# Altium PCB Pi3-GPS-Neo6M.PcbDoc
Units mm, origin at the board's own origin, x right, y up, seen from the top; angles counter-clockwise.
Board outline 87.26 x 57.77 mm, 2 copper layers (Top Layer, Bottom Layer); 10 components, 19 nets, 104 pads, 148 vias.
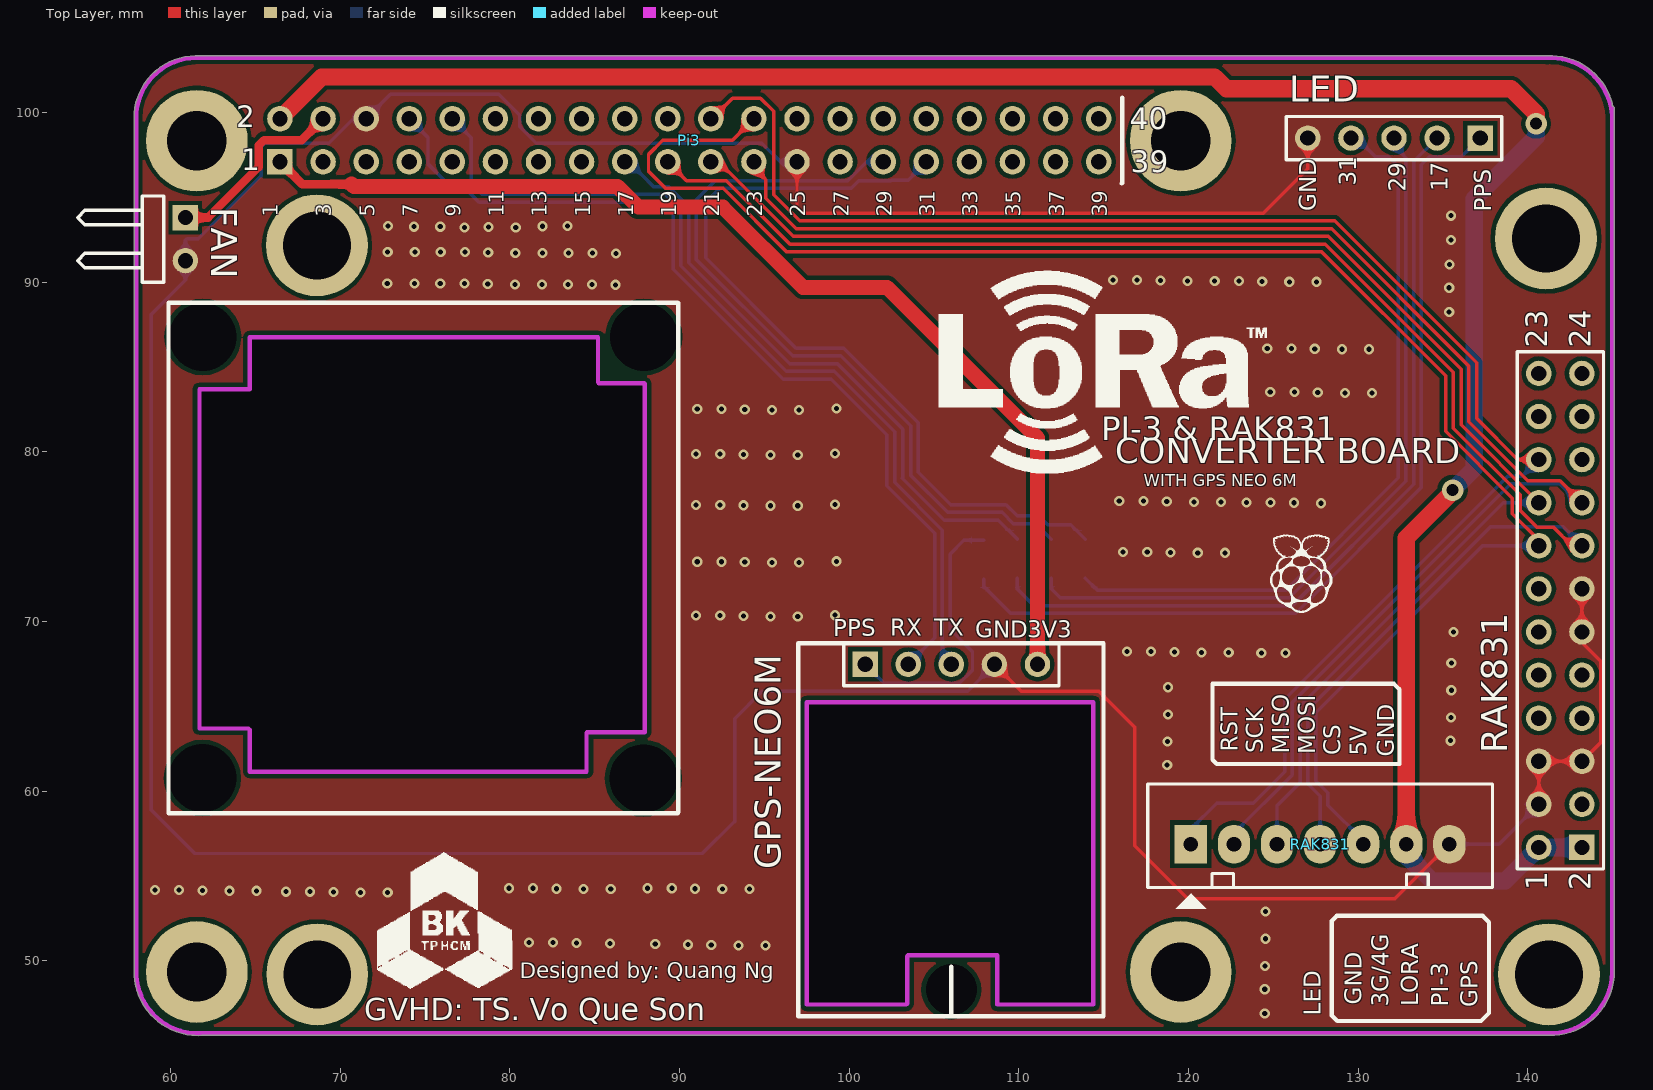
[diagram p0: Top Layer view]
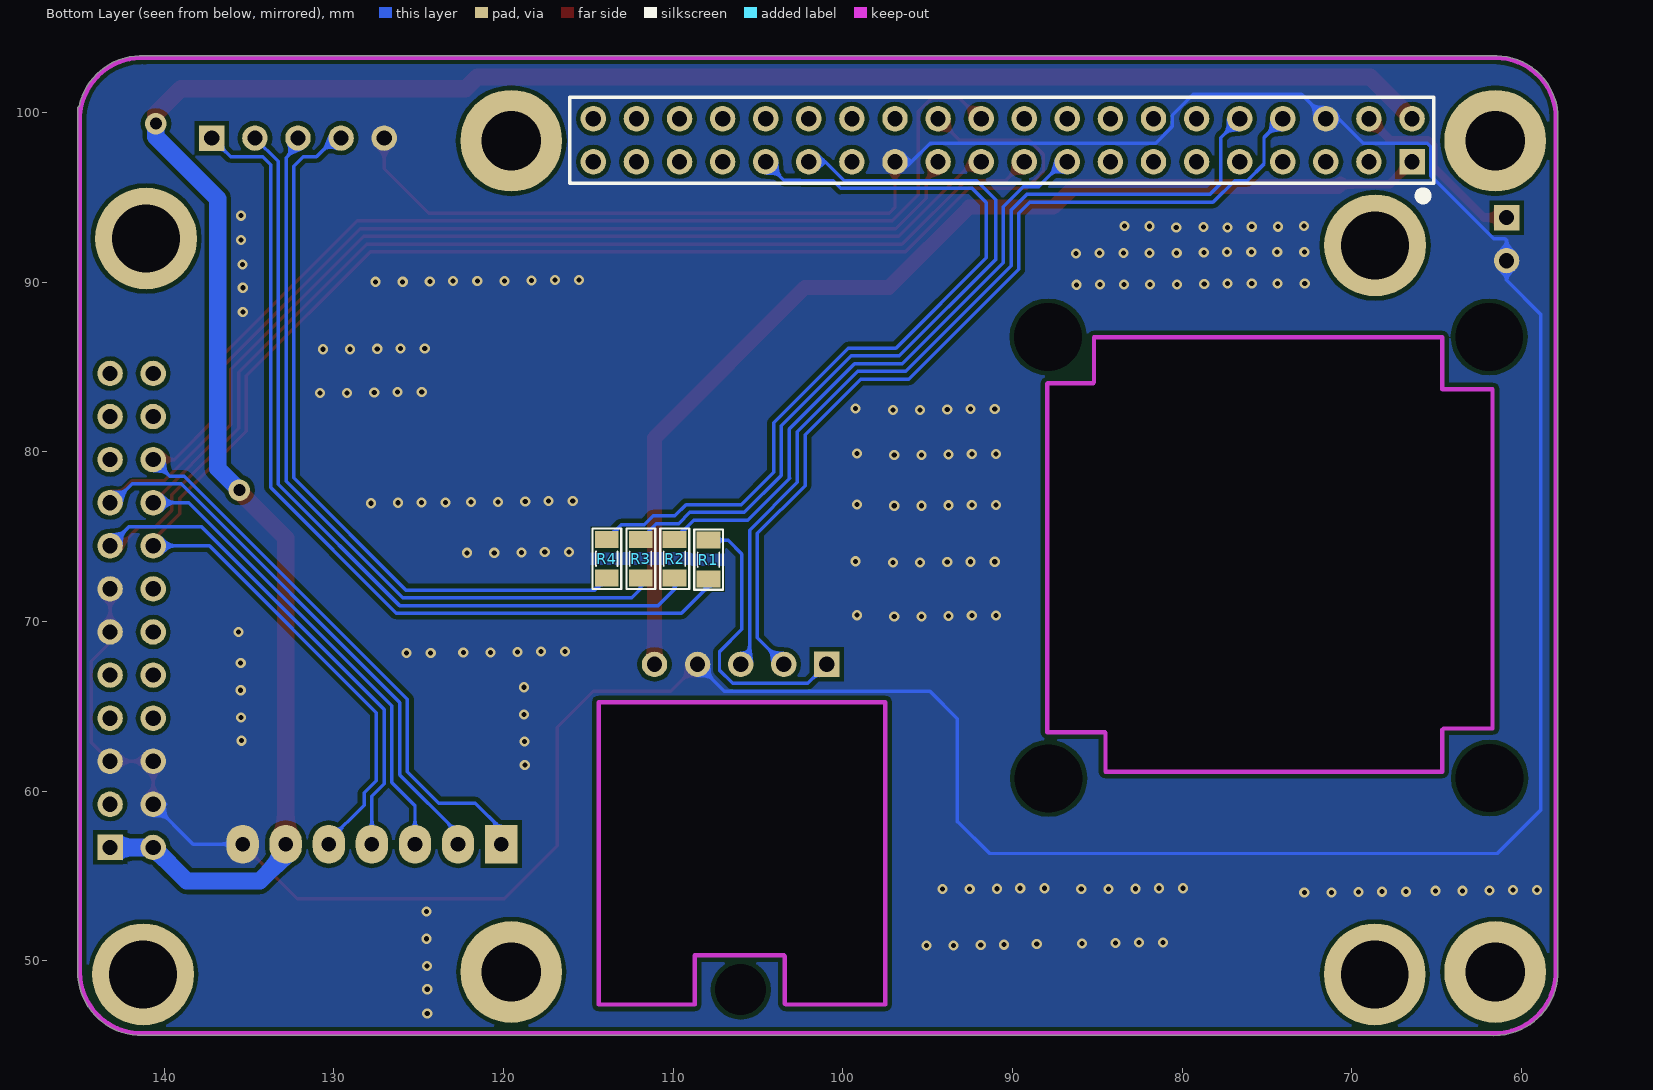
[diagram p1: Bottom Layer view, seen from below]

## Layer stack, top to bottom
Top Solder: solder mask 0.0102, Solder Resist, Dk 3.5
Top Layer: signal copper 0.0356
Dielectric 1: dielectric 0.32, FR-4, Dk 4.8
Bottom Layer: signal copper 0.0356
Bottom Solder: solder mask 0.0102, Solder Resist, Dk 3.5

## Board outline
61.278,45.607 ccw(c61.325,45.725) 61.325,45.598 61.396,45.598 ccw(c61.625,49.375) 61.854,45.598 141.55,45.598 ccw(c141.55,45.725) 141.558,45.598 ccw(c141.325,49.375) 145.109,49.375 ccw(c141.325,49.375) 145.102,49.604 145.102,100.25 ccw(c144.975,100.25) 145.026,100.367 ccw(c141.325,99.575) 141.123,103.354 61.477,103.354 ccw(c61.477,103.227) 61.475,103.354 ccw(c61.52,99.682) 57.848,99.638 ccw(c61.52,99.682) 57.848,99.637 57.848,99.639 57.848,49.15 ccw(c57.975,49.15) 57.848,49.142 ccw(c61.625,49.375)
cut-out: 64.675,86.75 85.2,86.75 85.2,84.1 85.3,84 87.95,84 87.95,63.475 84.525,63.475 84.525,61.15 64.675,61.15 64.675,63.625 64.6,63.7 61.702,63.7 61.702,83.7 64.675,83.7
cut-out: 97.5,65.25 114.4,65.25 114.4,47.425 108.725,47.425 108.725,50.325 103.475,50.325 103.475,47.425 97.5,47.425

## Design rules (kind name [scope] priority, off if disabled: settings)
Clearance [All] p1: gap=0.254 ignorepadtopadclearanceinfootprint=FALSE except(0: Arc-Hole Track-Hole SMDPad-Hole THPad-Hole Via-Hole Fill-Hole Poly-Hole Region-Hole Text-Hole)
PlaneConnect [All] p1: planeconnectstyle=Direct reliefexpansion=0.508 reliefentries=4 reliefconductorwidth=0.254 reliefairgap=0.254
PolygonConnect [All] p1: connectstyle=Direct reliefconductorwidth=0.254 reliefentries=4 polygonreliefangle="90 Angle" airgapwidth=0.254
RoutingVias [All] p1: holewidth=1.5 width=0.6 viastyle="Through Hole" minholewidth=0.3 minwidth=0.3 maxholewidth=0.3 maxwidth=1.5
SolderMaskExpansion [All] p1: expansion=0.102
Width [All] p1: maxlimit=1.016 minlimit=0.203 preferedwidth=0.203 minimp=50.000000 maximp=50.000000 favimp=50.000000
29 further rules are at their usual default settings.

## Classes and differential pairs
component class Pi3-GPS-Neo6M: FAN GPS-NEO6M LED Pi3 R1 R2 R3 R4 RAK831

## Components (designator, comment, footprint, x,y, rotation, side; value= is the part's Value field where it differs from the comment)
FAN "Cooling Fan" HDR1X2H 60.875,93.815 r270 top
GPS-NEO6M "GPS-NEO6M-UART" GPS-NEO6M-UART 115,68.725 r270 top
LED "LED NOTIFY" HDR1X5 137.2,98.5 r180 top
Pi3 "RPI GPIO Connector" rpi 90.58,98.37 r180 top
R1 "330" RES-SMD-0805 107.925,73.65 r90 bottom
R2 "330" RES-SMD-0805 109.925,73.7 r90 bottom
R3 "330" RES-SMD-0805 111.925,73.7 r90 bottom
R4 "330" RES-SMD-0805 113.925,73.7 r90 bottom
RAK831 "JP7" Header7 120.145,56.875 r0 top value="Connector 7"
RAK831 "RAK831 Header" HDR2X12 143.2,56.685 r90 top

## Footprints (in the part's own frame and the unit in brackets; to place one, negate y for a bottom-side part, rotate by r counter-clockwise, add the part's x,y. Pads: shape width x height; smd on the part's side, far side on the other; paste and mask are expansions set on the pad)
GPS-NEO6M-UART [mm]
  rect 1.5x1.5 hole 0.9: 0(1.25,-14.055)
  round 1.5 hole 0.9: 1(1.25,-11.515) 2(1.25,-8.975) 3(1.25,-6.435) 4(1.25,-3.895)
  round 1.524 hole 3: 5(20.425,-8.975)
  silkscreen extent -0.02,-18 22,0
HDR1X2H [mm] "Connector; Header; 2 Position; Right Angle"
  rect 1.5x1.5 hole 0.9: 1(0,0)
  round 1.5 hole 0.9: 2(2.54,0)
  silkscreen extent -1.27,-6.35 3.81,-1.27
HDR1X5 [mm] "Connector; Header; 5 Position"
  rect 1.5x1.5 hole 0.9: 1(0,0)
  round 1.5 hole 0.9: 2(2.54,0) 3(5.08,0) 4(7.62,0) 5(10.16,0)
  silkscreen extent -1.27,-1.27 11.43,1.27
HDR2X12 [mm] "Connector; Header; 12x2 Position"
  rect 1.5x1.5 hole 0.9: 1(0,0)
  round 1.5 hole 0.9: 2(0,2.54) 3(2.54,0) 4(2.54,2.54) 5(5.08,0) 6(5.08,2.54) 7(7.62,0) 8(7.62,2.54) 9(10.16,0) 10(10.16,2.54) 11(12.7,0) 12(12.7,2.54) 13(15.24,0) 14(15.24,2.54) 15(17.78,0) 16(17.78,2.54) 17(20.32,0) 18(20.32,2.54) 19(22.86,0) 20(22.86,2.54) 21(25.4,0) 22(25.4,2.54) 23(27.94,0) 24(27.94,2.54)
  silkscreen extent -1.27,-1.27 29.21,3.81
Header7 [mil] "CON7"
  rect 75x90 hole 34: 1(0,0)
  oval 75x90 hole 34: 2(100,0) 3(200,0) 4(300,0) 5(400,0) 6(500,0) 7(600,0)
  silkscreen extent -100,-150 700,140
RES-SMD-0805 [mil]
  rect 39.37x55 smd: 1(-45,0) 2(45,0)
  silkscreen extent -70,-34 70,33, body extent -39,-25 39,25, height 31
rpi [mm]
  rect 1.5x1.5 hole 0.9: 1(24.13,1.27)
  round 1.5 hole 0.9: 2(24.13,-1.27) 3(21.59,1.27) 4(21.59,-1.27) 5(19.05,1.27) 6(19.05,-1.27) 7(16.51,1.27) 8(16.51,-1.27) 9(13.97,1.27) 10(13.97,-1.27) 11(11.43,1.27) 12(11.43,-1.27) 13(8.89,1.27) 14(8.89,-1.27) 15(6.35,1.27) 16(6.35,-1.27) 17(3.81,1.27) 18(3.81,-1.27) 19(1.27,1.27) 20(1.27,-1.27) 21(-1.27,1.27) 22(-1.27,-1.27) 23(-3.81,1.27) 24(-3.81,-1.27) 25(-6.35,1.27) 26(-6.35,-1.27) 27(-8.89,1.27) 28(-8.89,-1.27) 29(-11.43,1.27) 30(-11.43,-1.27) 31(-13.97,1.27) 32(-13.97,-1.27) 33(-16.51,1.27) 34(-16.51,-1.27) 35(-19.05,1.27) 36(-19.05,-1.27) 37(-21.59,1.27) 38(-21.59,-1.27) 39(-24.13,1.27) 40(-24.13,-1.27)
  body extent -25.52,-2.63 25.53,2.38, height 8.5

## Part data
FAN: library part "Header 2H", "Header, 2-Pin, Right Angle", LatestRevisionDate=17-Jul-2002, LatestRevisionNote="Re-released for DXP Platform.", Publisher="Altium Limited"
LED: library part "Header 5", "Header, 5-Pin", LatestRevisionDate=17-Jul-2002, LatestRevisionNote="Re-released for DXP Platform.", Publisher="Altium Limited"
Pi3: library part "rpi connector", "GPIO Header for Raspberry Pi A+/B+/Pi 2/Pi 3 - 2x20", Manufacturer="SparkFun Electronics", Manufacturer Part Number=PRT-14017, Supplier Part Number 1=1568-1462-ND, Accessory Type=Connector, Category="Development Boards, Kits, Programmers", ComponentLink1Description=https://cdn.sparkfun.com/datasheets/Dev/RaspberryPi/12313.pdf, ComponentLink1URL=https://cdn.sparkfun.com/datasheets/Dev/RaspberryPi/12313.pdf, For Use With/Related Products="Raspberry Pi", Nils Minor=author, nilsminor@web.de=mail, Part Status=Active, Pricing 1="1=1.84 (EUR)", RoHS="RoHS Compliant", Stock 1=150, Supplier 1=Digi-Key
R1 R2 R3 R4: library part Res-SMD, "Resistor", Manufacturer="Generic Components", Class=Passive, Published=08/06/2000, Publisher="Altium Hobart Technology Centre"
RAK831: library part Header7, "Connector 7"
RAK831: library part "Header 12X2", "Header, 12-Pin, Dual row", LatestRevisionDate=17-Jul-2002, LatestRevisionNote="Re-released for DXP Platform.", Publisher="Altium Limited"

## Free pads (board coordinates)
  round 1.524 hole 4: 6(61.875,60.775) 6(61.9,86.775) 6(87.875,60.75) 6(87.9,86.775)
  round 6 hole 4: 6(68.625,92.175) 6(68.65,49.2) 6(141.075,92.575) 6(141.25,49.2)
  round 6 hole 3.5: ""(61.548,49.342) ""(61.548,98.342) ""(119.548,49.342) ""(119.548,98.342)

## Via types
v1: diameter 0.6, hole 0.3, Top Layer to Bottom Layer, tented both sides, 146 vias
v2: diameter 1.27, hole 0.711, Top Layer to Bottom Layer, tented both sides, 1 vias
v3: diameter 1.27, hole 0.711, Top Layer to Bottom Layer, 1 vias

## Nets (pads, with @x,y where several pads share a name; then routed paths per layer and width w, separated by ;. In a path a pad name is that pad's centre, name@x,y a point inside that pad or via, vN(x,y) a via of type N, cw(c..) or ccw(c..) an arc to the next point about the centre after c; other vN are vias at no path point)
3G: Pi3.31 R4.2 | length 48.2
  Bottom Layer w0.203: Pi3.31 103.475,96.025 102.499,96.025 102.468,95.994 100.575,95.994 100.117,95.537 92.387,95.537 91.55,94.7 91.55,91.436 96.87,86.117 99.695,86.117 104.083,81.729 104.083,78.8 105.993,76.889 109.25,76.889 109.907,76.232 111.182,76.232 111.715,75.7 113.068,75.7 R4.2
+3V3: GPS-NEO6M.4 Pi3.1 | length 64.7
  Top Layer w0.508: Pi3.1 67.767,95.783 70.675,95.783
  Top Layer w0.889: 70.675,95.783 70.807,95.651 86.35,95.651 87.576,94.425 92.557,94.425 97.282,89.7 102.225,89.7 111.105,80.82 GPS-NEO6M.4
+5: Pi3.2 RAK831.1@143.2,56.685 RAK831.2@140.66,56.685 RAK831.6@132.845,56.875 | length 134.3
  Top Layer w1.016: Pi3.2 68.914,102.104 121.546,102.104 122.25,101.4 139.025,101.4 140.5,99.925 v3(140.5,99.35) ; RAK831.6@132.845,56.875 132.845,74.92 v2@135.425,77.5
  Bottom Layer w1.016: RAK831.6@132.845,56.875 132.845,56.23 134.375,54.7 138.675,54.7 140.66,56.685 RAK831.1@143.2,56.685 ; v2(135.575,77.75) 136.85,79.025 136.85,94.925 140.5,98.575 v3(140.5,99.35)
CS: Pi3.24 RAK831.5@130.305,56.875 RAK831.16 | length 98.6
  Top Layer w0.203: Pi3.24 93.125,98.375 89.021,98.375 88.175,97.529 88.175,96.537 89.175,95.537 92.576,95.537 96.328,91.786 127.871,91.786 135.161,84.496 135.161,81.211 139.097,77.275 139.097,76.358 140.73,74.725 140.66,74.725 RAK831.16
  Bottom Layer w0.203: RAK831.5@130.305,56.875 130.305,57.095 128.222,59.178 128.222,59.899 127.5,60.622 127.5,64.625 137.34,74.465 RAK831.16
GPS: GPS-NEO6M.0 R1.2 | length 16.8
  Bottom Layer w0.203: GPS-NEO6M.0 102.07,66.35 106.5,66.35 107.275,67.125 107.275,68.225 105.957,69.543 105.957,73.982 106.768,74.793 R1.2
LORA: Pi3.29 R3.2 | length 45
  Bottom Layer w0.203: Pi3.29 101.034,97.1 99.928,95.994 92.1,95.994 92.1,95.975 91,94.875 91,91.34 96.68,85.659 99.505,85.659 103.625,81.539 103.625,78.611 105.804,76.432 109.025,76.432 109.682,75.775 110.993,75.775 R3.2
MISO: Pi3.21 RAK831.3@125.225,56.875 RAK831.18 | length 86.9
  Top Layer w0.203: Pi3.21 92.307,97.1 96.707,92.7 128.25,92.7 136.075,84.875 136.075,81.59 RAK831.18 RAK831.18@140.717,77.005
  Bottom Layer w0.203: RAK831.3@125.225,56.875 125.225,59.15 126.586,60.511 126.586,65.036 138.555,77.005 RAK831.18
MOSI: Pi3.19 RAK831.4@127.765,56.875 RAK831.15 | length 95.1
  Top Layer w0.203: Pi3.19 90.416,95.994 92.766,95.994 96.517,92.243 128.061,92.243 135.618,84.686 135.618,81.401 139.554,77.464 139.554,76.547 140.531,75.571 141.504,75.571 142.61,74.465 RAK831.15
  Bottom Layer w0.203: RAK831.4@127.765,56.875 127.765,59.71 127.043,60.432 127.043,64.814 137.828,75.6 142.065,75.6 RAK831.15
NetFAN_1: FAN.1 Pi3.4 | length 11.3
  Top Layer w0.508: FAN.1 62.215,93.815 65.192,96.792 65.192,98.06 65.514,98.382 67.732,98.382 Pi3.4
NetLabel34: FAN.2 GPS-NEO6M.3 LED.5 Pi3.6 Pi3.25 RAK831.4@140.66,59.225 RAK831.5@143.2,61.765 RAK831.6@140.66,61.765 RAK831.7@135.385,56.875 RAK831.11 RAK831.13 | length 233
  Top Layer w0.203: Pi3.25 96.93,94.417 97.275,94.072 124.425,94.072 127.04,96.687 LED.5 ; GPS-NEO6M.3 110.14,65.9 114.725,65.9 116.85,63.775 116.85,56.775 119.975,53.65 132.16,53.65 RAK831.7@135.385,56.875 ; RAK831.4@140.66,59.225 140.66,61.765 143.2,61.765 144.306,62.871 144.306,67.669 143.2,68.775 RAK831.11 RAK831.13
  Bottom Layer w0.203: Pi3.25 95.954,97.1 94.848,98.206 81.561,98.206 80.584,99.182 80.584,99.85 79.359,101.075 72.965,101.075 Pi3.6 70.765,99.64 69.331,98.206 65.553,98.206 65.344,97.997 65.344,96.282 61.638,92.575 60.971,92.575 60.875,92.479 FAN.2 60.875,90.125 58.875,88.125 58.875,58.875 61.425,56.325 91.35,56.325 93.225,58.2 93.25,58.2 93.25,64.275 94.868,65.893 106.983,65.893 GPS-NEO6M.3 ; RAK831.7@135.385,56.875 138.31,56.875 140.66,59.225 RAK831.4@139.925,59.225
  other v1: 124.5,46.9 124.5,48.325 124.525,49.7 93.475,50.9 95.075,50.9 91.875,50.925 90.5,50.95 88.575,51 85.9,51.025 83.925,51.05 81.125,51.075 82.55,51.075 124.55,51.3 124.55,52.9 71.2,54.025 72.8,54.025 69.6,54.05 66.8,54.075 68.225,54.075 63.475,54.125 65.075,54.125 61.875,54.15 59.075,54.175 60.5,54.175 84.35,54.225 85.95,54.225 92.525,54.225 94.125,54.225 82.75,54.25 90.925,54.25 79.95,54.275 81.375,54.275 88.125,54.275 89.55,54.275 118.75,61.55 118.775,62.925 135.45,62.975 135.475,64.35 118.8,64.525 135.5,65.95 118.8,66.125 135.5,67.55 124.3,68.15 125.725,68.15 120.775,68.175 122.375,68.175 119.175,68.2 116.375,68.225 117.8,68.225 135.625,69.375 95.375,70.3 96.975,70.3 93.775,70.325 90.975,70.35 92.4,70.35 99.175,70.375 95.45,73.475 97.05,73.475 93.85,73.5 91.05,73.525 92.475,73.525 99.25,73.55 120.55,74.05 122.15,74.05 118.95,74.075 116.15,74.1 117.575,74.1 95.375,76.825 96.975,76.825 93.775,76.85 90.975,76.875 92.4,76.875 99.175,76.9 126.225,77 127.825,76.975 123.425,77.025 124.85,77.025 120.325,77.05 121.925,77.05 118.725,77.075 115.925,77.1 117.35,77.1 95.375,79.825 96.975,79.825 93.775,79.85 90.975,79.875 92.4,79.875 99.175,79.9 95.45,82.475 97.05,82.475 93.85,82.5 91.05,82.525 92.475,82.525 99.25,82.55 129.225,83.475 130.825,83.475 127.625,83.5 124.825,83.525 126.25,83.525 129.05,86.05 130.65,86.05 127.45,86.075 124.65,86.1 126.075,86.1 135.375,88.25 135.375,89.675 86.225,89.85 80.3,89.875 81.9,89.875 83.425,89.875 84.85,89.875 78.7,89.9 72.775,89.925 74.375,89.925 75.9,89.925 77.325,89.925 125.95,90.025 127.55,90.025 124.35,90.05 119.95,90.075 121.55,90.075 122.975,90.075 118.35,90.1 115.55,90.125 116.975,90.125 135.4,91.05 86.25,91.7 80.325,91.725 81.925,91.725 83.45,91.725 84.875,91.725 78.725,91.75 72.8,91.775 74.4,91.775 75.925,91.775 77.35,91.775 135.475,92.5 77.325,93.225 80.35,93.225 78.75,93.25 74.35,93.275 75.9,93.275 81.925,93.3 72.825,93.325 83.4,93.325 135.475,93.925
NetLED_1: LED.1 R1.1 | length 53.1
  Bottom Layer w0.203: R1.1 107.925,72.075 109.514,70.486 126.325,70.486 133.739,77.9 133.739,96.933 134.202,97.395 ; 134.202,97.394 136.094,97.394 LED.1
NetLED_2: LED.2 R2.1 | length 48.4
  Bottom Layer w0.203: R2.1 109.925,71.9 110.882,70.943 126.136,70.943 133.282,78.089 133.282,97.122 LED.2
NetLED_3: LED.3 R3.1 | length 45.1
  Bottom Layer w0.203: R3.1 111.925,71.925 112.45,71.4 125.947,71.4 132.825,78.278 132.825,97.35 132.12,98.055 LED.3
NetLED_4: LED.4 R4.1 | length 43.3
  Bottom Layer w0.203: R4.1 114.625,71.857 125.757,71.857 132.368,78.468 132.368,96.832 131.806,97.394 131.031,97.394 129.925,98.5 LED.4
PI-3: Pi3.17 R2.2 | length 36.1
  Bottom Layer w0.203: Pi3.17 87.025,97.1 88.131,95.994 88.131,95.969 88.468,95.632 89.361,95.632 90.543,94.45 90.543,91.15 96.491,85.202 99.316,85.202 103.168,81.35 103.168,78.479 103.139,78.45 105.614,75.975 108.793,75.975 R2.2
RST: Pi3.22 RAK831.1@120.145,56.875 RAK831.20 | length 95.9
  Top Layer w0.203: Pi3.22 91.915,99.64 93.125,100.85 94.775,100.85 95.55,100.075 95.55,95.15 97.086,93.614 128.629,93.614 136.989,85.254 136.989,81.969 139.413,79.545 RAK831.20
  Bottom Layer w0.203: RAK831.1@120.145,56.875 120.145,57.77 121.675,59.3 123.828,59.3 125.671,61.143 125.671,65.414 138.825,78.568 139.683,78.568 RAK831.20
RX0: GPS-NEO6M.2 Pi3.10 | length 52.3
  Bottom Layer w0.203: Pi3.10 77.725,98.525 77.725,95.822 78.372,95.175 89.172,95.175 90.086,94.261 90.086,90.961 96.302,84.745 99.127,84.745 102.682,81.189 102.682,78.2 105.5,75.382 105.5,68 GPS-NEO6M.2
SCK: Pi3.23 RAK831.2@122.685,56.875 RAK831.17 | length 92.5
  Top Layer w0.203: Pi3.23 94.39,96.735 95.093,96.032 95.093,94.961 96.896,93.157 128.439,93.157 136.532,85.064 136.532,81.779 140.012,78.3 141.905,78.3 RAK831.17
  Bottom Layer w0.203: RAK831.2@122.685,56.875 122.685,57.51 126.128,60.953 126.128,65.225 139.014,78.111 141.889,78.111 142.995,77.005 RAK831.17
TX0: GPS-NEO6M.1 Pi3.8 | length 54.1
  Bottom Layer w0.203: Pi3.8 75.176,98.534 75.176,96.971 76.152,95.994 76.906,95.994 78.182,94.718 88.982,94.718 89.628,94.072 89.628,90.772 96.112,84.288 98.937,84.288 102.225,81 102.225,78.011 105.043,75.193 105.043,69.033 GPS-NEO6M.1
pads on no net: GPS-NEO6M.5 Pi3.3 Pi3.5 Pi3.7 Pi3.9 Pi3.11 Pi3.12 Pi3.13 Pi3.14 Pi3.15 Pi3.16 Pi3.18 Pi3.20 Pi3.26 Pi3.27 Pi3.28 Pi3.30 Pi3.32 Pi3.33 Pi3.34 Pi3.35 Pi3.36 Pi3.37 Pi3.38 Pi3.39 Pi3.40 RAK831.3@143.2,59.225 RAK831.7@143.2,64.305 RAK831.8 RAK831.9 RAK831.10 RAK831.12 RAK831.14 RAK831.19 RAK831.21 RAK831.22 RAK831.23 RAK831.24

## Polygon pours and split planes (outlines as drawn)
NetLabel34 on Top Layer "NETLABEL34_L01_P023" (solid, pour order 23): 61.278,45.607 ccw(c61.325,45.725) 61.325,45.598 61.396,45.598 ccw(c61.625,49.375) 61.854,45.598 141.55,45.598 ccw(c141.55,45.725) 141.558,45.598 ccw(c141.325,49.375) 145.109,49.375 ccw(c141.325,49.375) 145.102,49.604 145.102,100.25 ccw(c144.975,100.25) 145.026,100.367 ccw(c141.325,99.575) 141.123,103.354 61.477,103.354 ccw(c61.477,103.226) 61.475,103.354 ccw(c61.52,99.682) 57.848,99.638 ccw(c61.531,99.684) 57.848,99.637 57.848,99.639 57.848,49.15 ccw(c57.975,49.15) 57.848,49.142 ccw(c61.625,49.375)
NetLabel34 on Bottom Layer "Top Layer-No Net" (solid, pour order 24): 61.278,45.607 ccw(c61.325,45.725) 61.325,45.598 61.396,45.598 ccw(c61.625,49.375) 61.854,45.598 141.55,45.598 ccw(c141.55,45.725) 141.558,45.598 ccw(c141.325,49.375) 145.109,49.375 ccw(c141.325,49.375) 145.102,49.604 145.102,100.25 ccw(c144.975,100.25) 145.026,100.367 ccw(c141.325,99.575) 141.123,103.354 61.477,103.354 ccw(c61.477,103.226) 61.475,103.354 ccw(c61.52,99.682) 57.848,99.638 ccw(c61.531,99.684) 57.848,99.637 57.848,99.639 57.848,49.15 ccw(c57.975,49.15) 57.848,49.142 ccw(c61.625,49.375)

## Keep-outs
Keep-Out Layer:
  lines w0.254: 61.325,45.725 141.55,45.725 ccw(c141.325,49.375) 144.975,49.6 144.975,100.25 ; 61.85,45.725 cw(c61.625,49.375) 57.975,49.15 57.975,99.639 cw(c61.52,99.682) 61.477,103.227 141.127,103.227 cw(c141.325,99.575) 144.975,99.8 ; 61.702,63.7 64.6,63.7 64.675,63.625 64.675,61.15 84.525,61.15 84.525,63.45 84.55,63.475 87.95,63.475 87.95,84.025 87.925,84.05 85.25,84.05 85.2,84.1 85.2,86.75 64.675,86.75 64.675,83.7 ; 61.702,63.7 61.702,63.7 ; 61.702,63.7 61.702,83.7 64.675,83.7 ; 64.675,83.7 64.675,83.7 ; 97.5,47.425 97.5,65.25 114.4,65.25 ; 97.5,47.425 97.5,47.425 ; 97.5,47.425 103.375,47.425 103.425,47.475 103.425,50.275 103.475,50.325 108.725,50.325 108.725,47.425 114.4,47.425 ; 114.4,47.425 114.4,47.425 ; 114.4,47.425 114.4,65.25 ; 114.4,65.25 114.4,65.25

## Other copper
Bottom Layer:
  region net LORA: 102.01,97.1

## Silkscreen, mask and mechanical layers (free items; w line width, h text height)
Top Overlay:
  drawing of 45 lines, arcs and shapes, not listed
  text "31" at 129.9,95.7 h1 r90
  text "17" at 135.275,95.35 h1 r90
  text "29" at 132.8,95.325 h1 r90
  text "GND" at 127.55,94.175 h1 r90
  text "PPS" at 137.85,94.15 h1 r90
  text "1" at 66.313,93.862 h0.89 r90
  text "3" at 69.488,93.862 h0.89 r90
  text "5" at 72.028,93.862 h0.89 r90
  text "7" at 74.568,93.862 h0.89 r90
  text "9" at 77.108,93.862 h0.89 r90
  text "11" at 79.648,93.862 h0.89 r90
  text "13" at 82.188,93.862 h0.89 r90
  text "15" at 84.728,93.862 h0.89 r90
  text "17" at 87.268,93.862 h0.89 r90
  text "19" at 89.808,93.862 h0.89 r90
  text "21" at 92.348,93.862 h0.89 r90
  text "23" at 94.888,93.862 h0.89 r90
  text "25" at 97.428,93.862 h0.89 r90
  text "27" at 99.968,93.862 h0.89 r90
  text "29" at 102.508,93.862 h0.89 r90
  text "31" at 105.048,93.862 h0.89 r90
  text "33" at 107.588,93.862 h0.89 r90
  text "35" at 110.128,93.862 h0.89 r90
  text "37" at 112.668,93.862 h0.89 r90
  text "39" at 115.208,93.862 h0.89 r90
  text "PI-3 & RAK831" at 114.85,80.675 h1.4
  text "CONVERTER BOARD" at 115.675,78.825 h2.5
  text "WITH GPS NEO 6M" at 117.375,77.725 h1.2
  text "RST" at 122.9,62.325 h1 r90
  text "SCK" at 124.4,62.225 h1 r90
  text "MISO" at 125.95,62.2 h1 r90
  text "MOSI" at 127.475,62.175 h1 r90
  text "CS" at 128.975,62.125 h1 r90
  text "5V" at 130.525,62.1 h1 r90
  text "GND" at 132.125,62.025 h1 r90
  text "Designed by: Quang Ng" at 80.575,48.65 h1.6
  text "GND" at 130.225,47.4 h1 r90
  text "LORA" at 133.55,47.325 h1 r90
  text "3G/4G" at 131.825,47.3 h1 r90
  text "PI-3" at 135.325,47.3 h1 r90
  text "GPS" at 137.05,47.25 h1 r90
  text "LED" at 127.8,46.75 h1 r90
  text "GVHD: TS. Vo Que Son" at 71.425,46.5 h1.3
Bottom Overlay:
  circle w0.5: c65.798,95.092 r0.25
Mechanical 2:
  lines w0: 97,65.225 97.075,46.725 ; 114.925,65.225 115,46.725
Drill Drawing:
  lines w0.254: 143.85,125.3 143.925,125.375

## Text inside footprints (layer, text, board x,y; h text height)
GPS-NEO6M: Top Overlay "PPS" at 99.075,69.125 h1; Top Overlay "RX" at 102.425,69.15 h1; Top Overlay "TX" at 105.025,69.15 h1; Top Overlay "GND" at 107.425,69.05 h1; Top Overlay "3V3" at 110.5,69.05 h1
Pi3: Top Overlay "40" at 116.53,99.02 h1.27; Top Overlay "39" at 116.605,96.47 h1.27; Top Overlay "1" at 64.18,96.595 h1.27; Top Overlay "2" at 63.88,99.145 h1.27
RAK831: Top Overlay "2" at 143.708,54.145 h1.27 r90; Top Overlay "1" at 141.168,54.145 h1.27 r90; Top Overlay "24" at 143.708,86.149 h1.27 r90; Top Overlay "23" at 141.168,86.149 h1.27 r90